# EAGLE board PCB_2.1 (EAGLE 7.6.0)
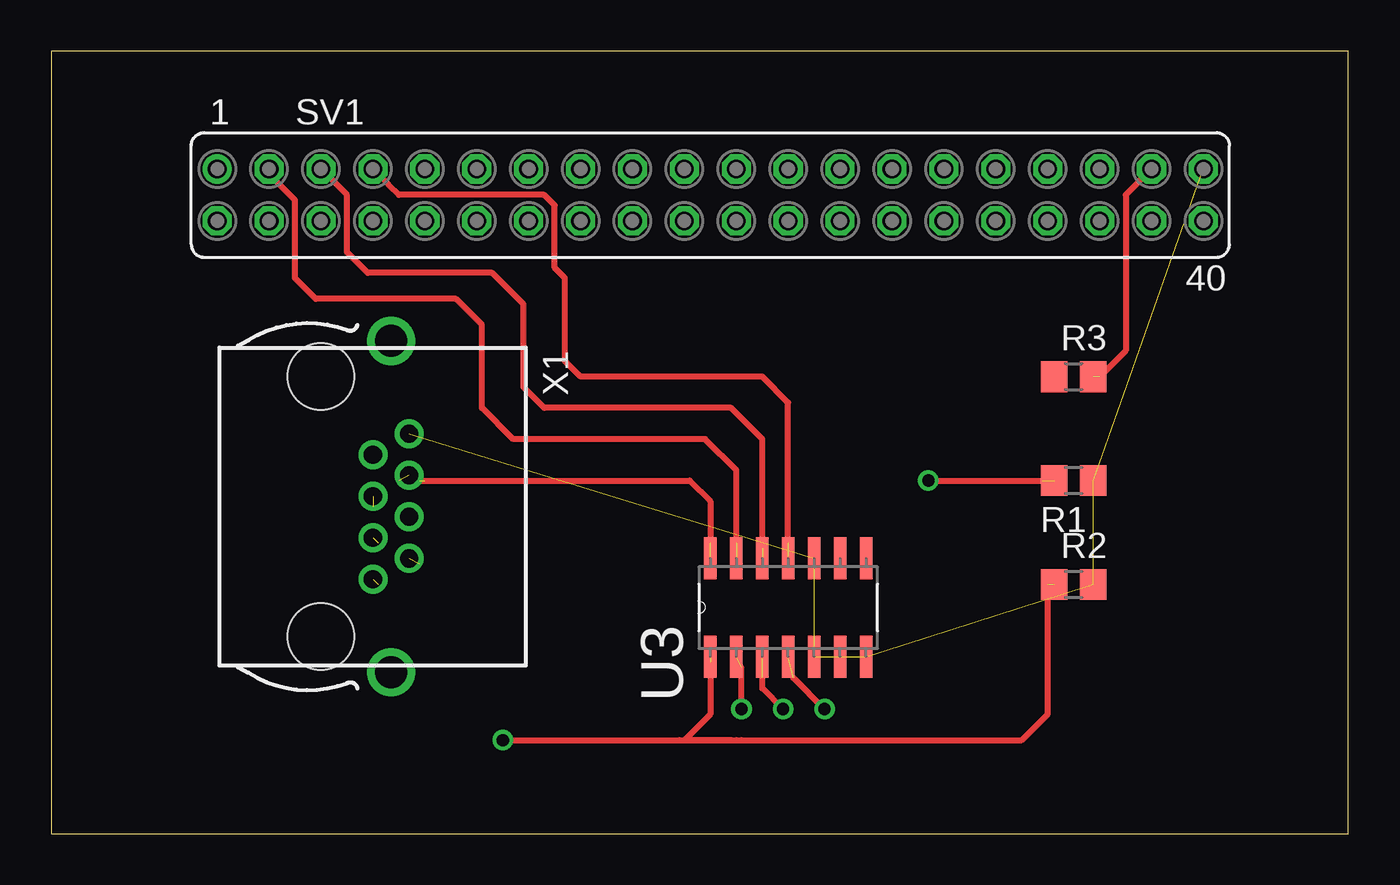
[diagram p0: board, top side]
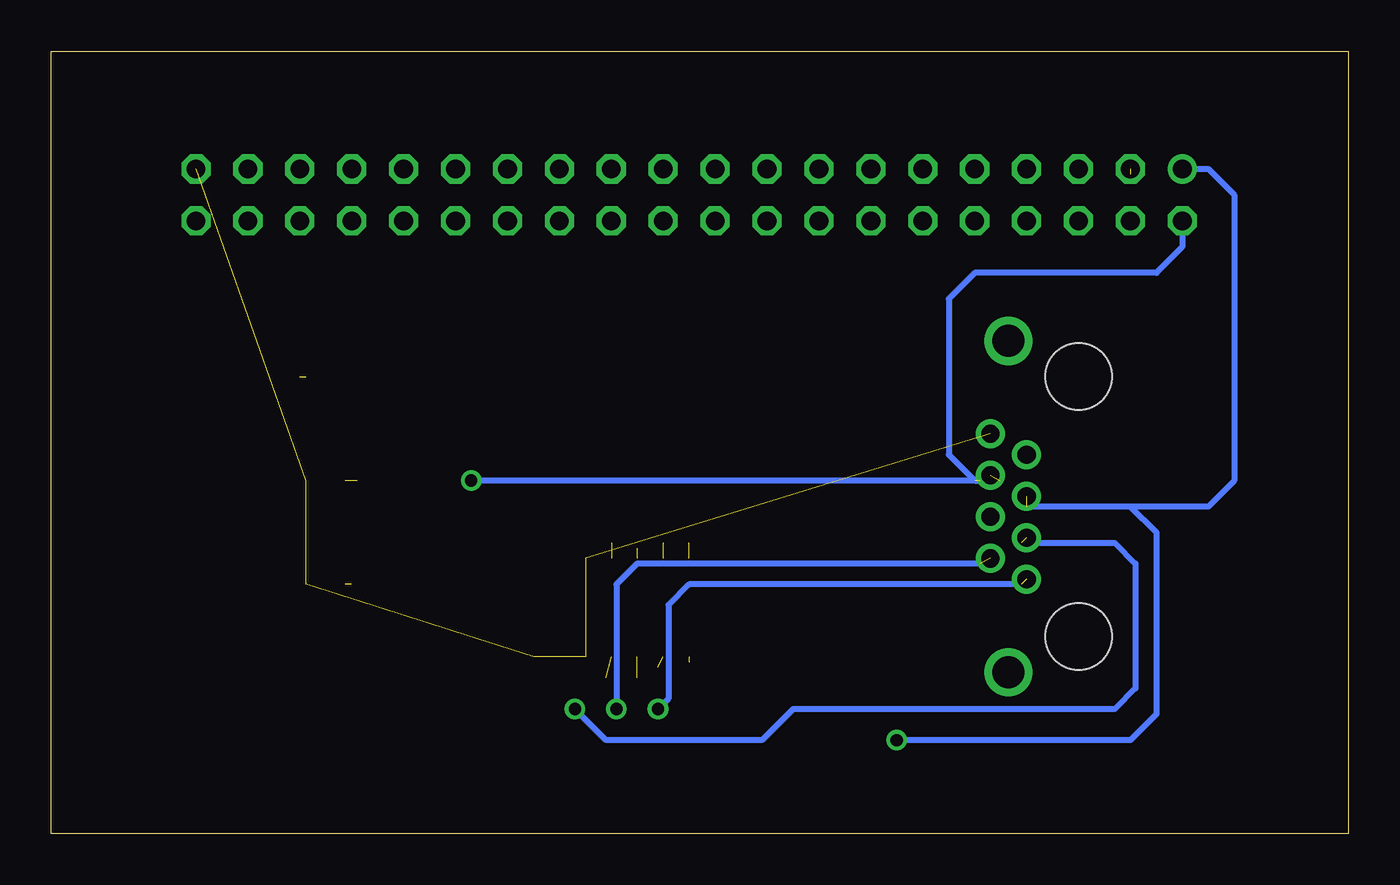
[diagram p1: board, bottom side, seen from below]

Size 63.48 x 38.28 mm. Coordinates in mm from the lower left corner, seen from the top.
Outline: 0,0 63.48,0 63.48,38.28 0,38.28 0,0
Copper layers (1*16): Top 0.035mm / dielectric 1.5mm / Bottom 0.035mm
Design rules "default *": minimum track width 10mil, minimum drill 24mil, track to track 8mil, track to pad 8mil, pad to pad 8mil, via to via 8mil, smd to smd 8mil, copper to edge 20mil, drill to drill 8mil, minimum pad ring 10mil, minimum via ring 8mil, stop-mask expansion 4mil, vias tented up to drill 0mil, thermal gap 10mil

## Footprints (pad centres in the part's own frame; a part is rotated, then mirrored left to right if it is on the bottom)
R0805 = smd 1.3 x 1.5: 1 -0.95,0; 2 0.95,0
FE20-2 = drill 0.914: 1 -24.13,1.27 | drill 0.914 octagon: 2 -24.13,-1.27; 3 -21.59,1.27; 4 -21.59,-1.27; 5 -19.05,1.27; 6 -19.05,-1.27; 7 -16.51,1.27; 8 -16.51,-1.27; 9 -13.97,1.27; 10 -13.97,-1.27; 11 -11.43,1.27; 12 -11.43,-1.27; 13 -8.89,1.27; 14 -8.89,-1.27; 15 -6.35,1.27; 16 -6.35,-1.27; 17 -3.81,1.27; 18 -3.81,-1.27; 19 -1.27,1.27; 20 -1.27,-1.27; 21 1.27,1.27; 22 1.27,-1.27; 23 3.81,1.27; 24 3.81,-1.27; 25 6.35,1.27; 26 6.35,-1.27; 27 8.89,1.27; 28 8.89,-1.27; 29 11.43,1.27; 30 11.43,-1.27; 31 13.97,1.27; 32 13.97,-1.27; 33 16.51,1.27; 34 16.51,-1.27; 35 19.05,1.27; 36 19.05,-1.27; 37 21.59,1.27; 38 21.59,-1.27; 39 24.13,1.27; 40 24.13,-1.27
SOIC127P600X175-14N = smd 2.057 x 0.61: 1 -4.801,7.62; 2 -4.801,6.35; 3 -4.801,5.08; 4 -4.801,3.81; 5 -4.801,2.54; 6 -4.801,1.27; 7 -4.801,0; 8 0,0; 9 0,1.27; 10 0,2.54; 11 0,3.81; 12 0,5.08; 13 0,6.35; 14 0,7.62
0446200002 = drill 0.889 pad 1.422: 1 3.556,2.54; 2 2.54,4.318; 3 1.524,2.54; 4 0.508,4.318; 5 -0.508,2.54; 6 -1.524,4.318; 7 -2.54,2.54; 8 -3.556,4.318 | drill 1.575 pad 2.286: S@1 -8.103,3.429; S@2 8.103,3.429 | hole 3.251: 6.35,0; -6.35,0

## Placement (x,y rotation side)
R1  [R0805]  50.04,17.27 180 top
R2  [R0805]  50.04,12.19 0 top
R3  [R0805]  50.04,22.35 0 top
SV1  [FE20-2]  32.26,31.24 0 top
U3  TXS0104ED  [SOIC127P600X175-14N]  39.88,13.46 90 top
X1  0446200002  [0446200002]  13.21,16 270 top

## Library data of the parts
R1-R3 = resistor
SV1 = con-lsta; OC_FARNELL: unknown; OC_NEWARK: unknown
U3 = TXS0104ED; AVAILABILITY: Unavailable; DESCRIPTION: 4-Bit Bidirectional Voltage-Level Shifter for Open-Drain and Push-Pull Applications 14-SOIC -40 to 85; MF: Texas Instruments; MP: TXS0104ED; PACKAGE: SOIC-14 Texas Instruments; PRICE: None
X1 = 0446200002; AVAILABILITY: Unavailable; DESCRIPTION: Conn RJ-45 RCP 8 POS 2.04mm Solder RA Thru-Hole 8 Terminal 1 Port Tray Cat 3; MF: Molex, LLC; MP: 0446200002; PACKAGE: None; PRICE: None

## Nets
A1: U3.2 X1.1
A2: U3.3 X1.2
A3: U3.4 X1.3
GND: R1.1 R2.2 SV1.39 U3.5 U3.7 U3.10 X1.8
INT: SV1.7 U3.11
LED: X1.4
N$1: R3.2 SV1.37
N$2: R3.1
OE: U3.8
SCL: SV1.5 U3.12
SDA: SV1.3 U3.13
VCCA: R2.1 SV1.1 U3.1 X1.5
VCCB: R1.2 SV1.2 U3.14 X1.6

## Tracks (layer width: path | path; a pad name or v marks a point on that pad's centre or on a via)
A1  (via drill 0.6)  (2 unrouted)
  Top 0.305: v33.78,6.1 33.78,8.13
  Bottom 0.305: 16,12.19 32.26,12.19 33.27,11.18 33.27,6.6 v33.78,6.1
A2  (via drill 0.6)  (2 unrouted)
  Top 0.305: v35.81,6.1 34.8,7.11 34.8,7.62
  Bottom 0.305: 18.03,13.21 34.8,13.21 35.81,12.19 v35.81,6.1
A3  (via drill 0.6)  (2 unrouted)
  Top 0.305: v37.85,6.1 36.32,7.62
  Bottom 0.305: 16,14.22 11.43,14.22 10.41,13.21 10.41,7.11 11.43,6.1 27.18,6.1 28.7,4.57 36.32,4.57 v37.85,6.1
GND  (6 unrouted)
INT  (1 unrouted)
  Top 0.305: 36.07,14.22 36.07,21.08 34.8,22.35 25.91,22.35 25.15,23.11 25.15,27.18 24.64,27.69 24.64,30.73 24.13,31.24 17.02,31.24 16.51,31.75 SV1.7
N$1  (1 unrouted)
  Top 0.305: SV1.37 52.58,31.24 52.58,23.62 51.31,22.35
SCL  (1 unrouted)
  Top 0.305: 34.8,13.97 34.8,19.3 33.27,20.83 24.13,20.83 23.11,21.84 23.11,25.91 21.59,27.43 15.49,27.43 14.48,28.45 14.48,31.24 SV1.5
SDA  (2 unrouted)
  Top 0.305: 33.53,14.22 33.53,17.78 32,19.3 22.61,19.3 21.08,20.83 21.08,24.89 19.81,26.16 12.95,26.16 11.94,27.18 11.94,30.99 10.67,32.26
VCCA  (via drill 0.6)  (3 unrouted)
  Top 0.305: v22.1,4.57 30.73,4.57 30.99,4.57 | 32.26,8.38 32.26,5.84 30.99,4.57 | 48.77,12.19 48.77,5.84 47.5,4.57 33.78,4.57 33.53,4.57 30.99,4.57 | 33.27,4.57 30.99,4.57
  Bottom 0.305: SV1.1 6.86,32.51 5.59,31.24 5.59,17.27 6.86,16 10.67,16 | 10.67,16 15.75,16 | 10.67,16 9.4,14.73 9.4,5.84 10.67,4.57 v22.1,4.57
VCCB  (via drill 0.6)  (4 unrouted)
  Top 0.305: v42.93,17.27 48.51,17.27 | 18.03,17.27 31.24,17.27 32.26,16.26 32.26,14.22
  Bottom 0.305: SV1.2 8.13,28.7 9.4,27.43 18.29,27.43 19.56,26.16 19.56,18.54 18.29,17.27 | 18.29,17.27 17.02,17.27 | 18.29,17.27 v42.93,17.27